# Altium PCB 三闪灯.PcbDoc
Units mm, origin at the board's own origin, x right, y up, seen from the top; angles counter-clockwise.
Board outline 152.4 x 101.6 mm, 2 copper layers (Top Layer, Bottom Layer); 16 components, 8 nets, 35 pads, 4 vias.
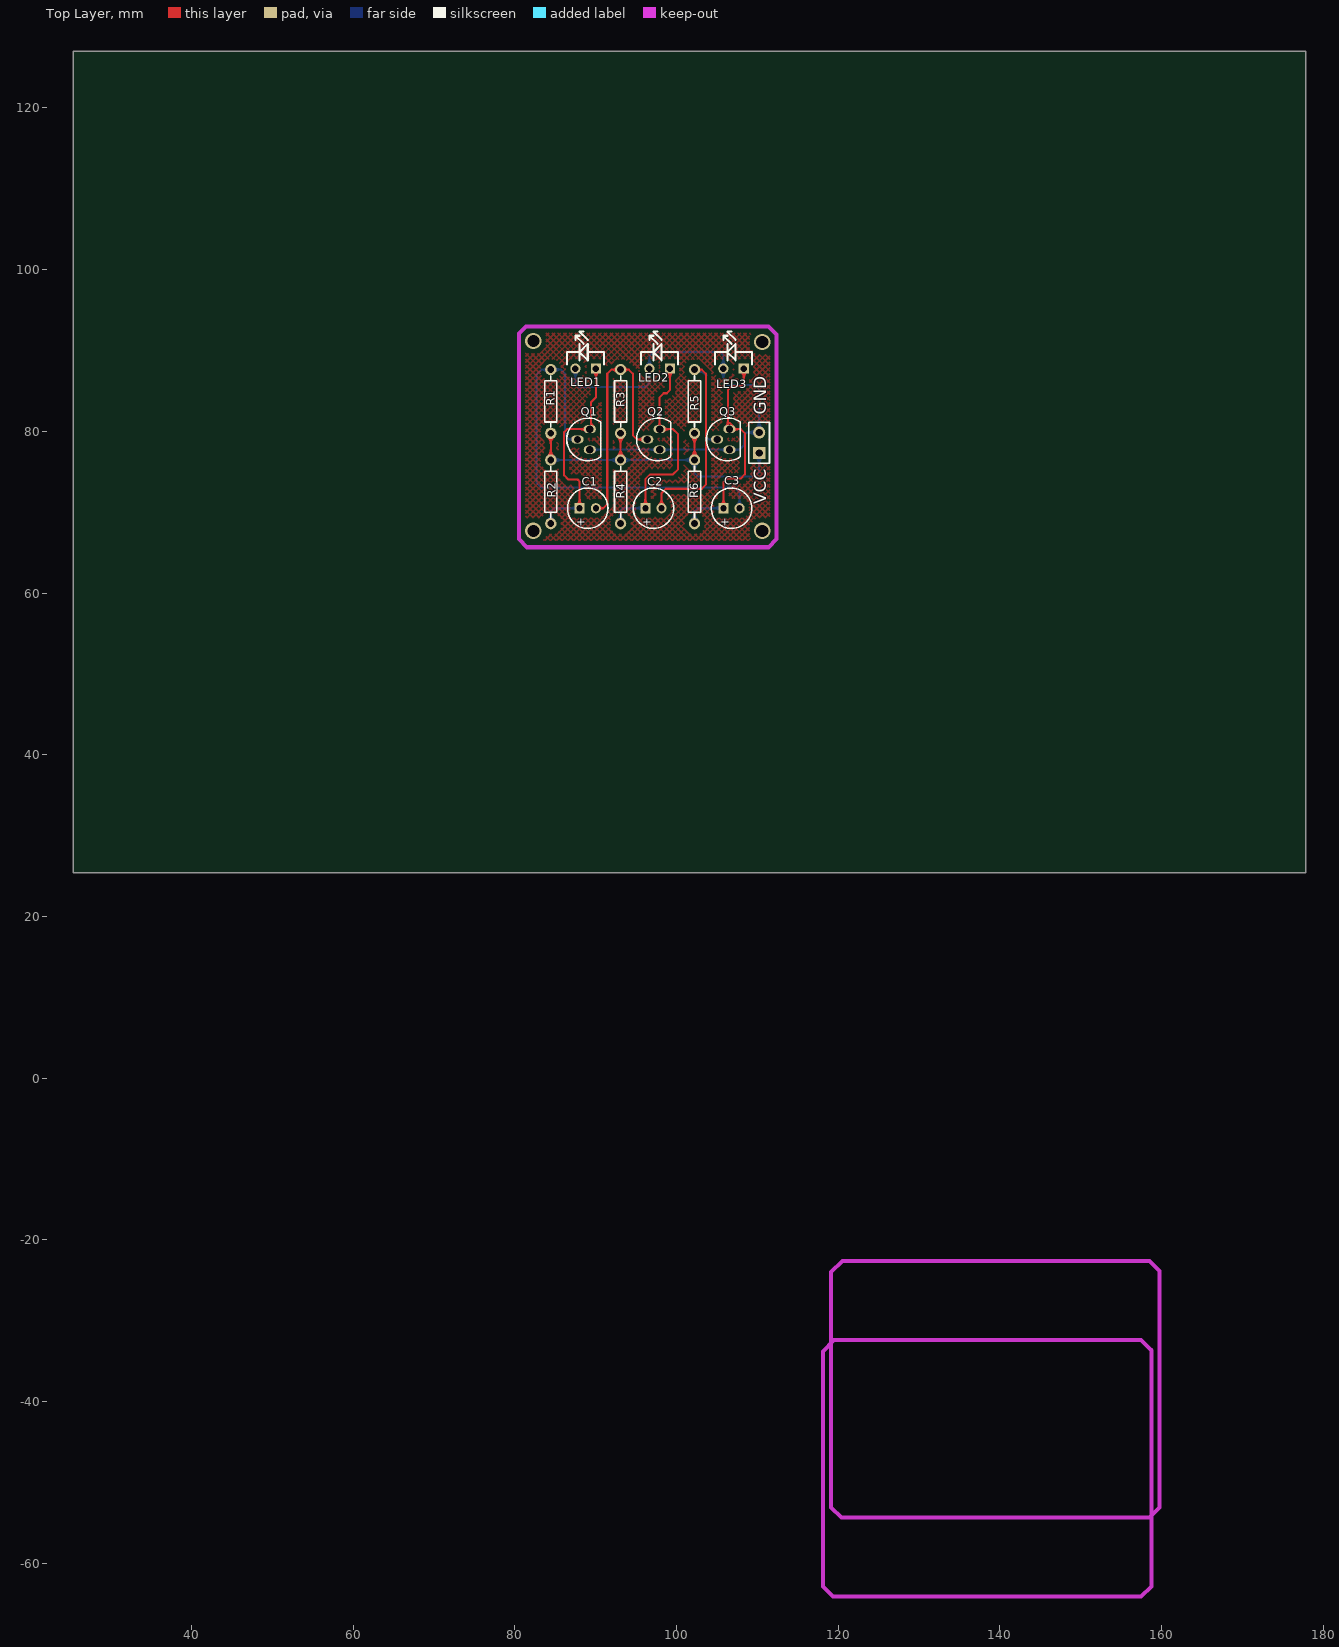
[diagram p0: Top Layer view]
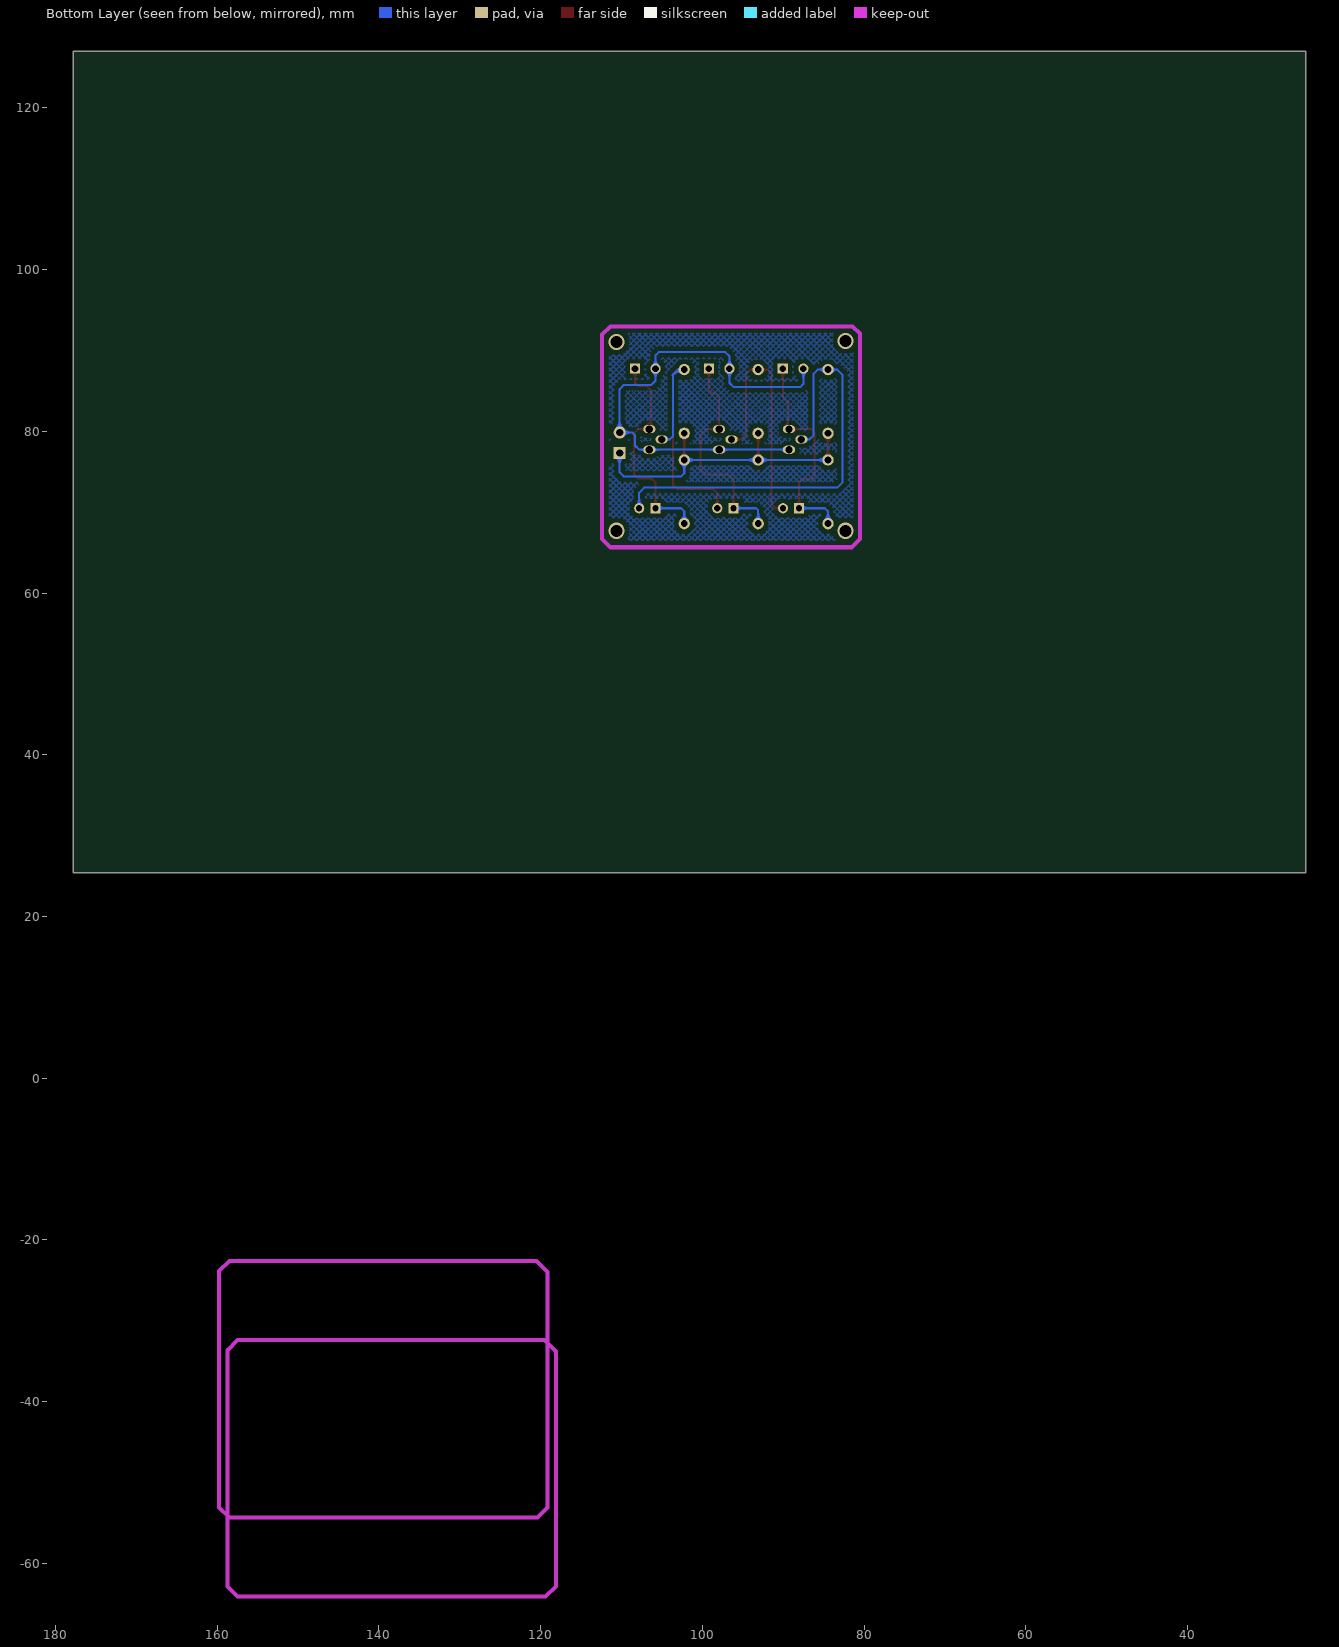
[diagram p1: Bottom Layer view, seen from below]

## Layer stack, top to bottom
Top Layer: signal copper 0.0356
Dielectric: dielectric 0.32, FR-4, Dk 4.8
Bottom Layer: signal copper 0.0356

## Board outline
25.4,25.4 177.8,25.4 177.8,127 25.4,127

## Design rules (kind name [scope] priority, off if disabled: settings)
Clearance [All] p1: gap=0.5
ComponentClearance [All] p1: gap=0.254 collisioncheckmode=3
PolygonConnect [All] p1: connectstyle=Relief reliefconductorwidth=0.254 reliefentries=4 polygonreliefangle="90 Angle"
RoutingTopology [All] p1: topology=Vertical
RoutingVias [All] p1: holewidth=0.711 width=1.27 viastyle="Through Hole" minholewidth=0.711 minwidth=1.27 maxholewidth=0.711 maxwidth=1.27
SolderMaskExpansion [All] p1: expansion=0.102
TestPointUsage [All] p1: valid=0 allowmultiple=FALSE
Testpoint [All] p1: side=15 testpointundercomponent=TRUE minsize=1.016 maxsize=2.54 preferedsize=1.524 minholesize=0 maxholesize=1.016 preferedholesize=0.813 testpointgrid=0.025 style=1023 order=-539222988
Width [All] p1: maxlimit=0.254 minlimit=0.254 preferedwidth=0.254
16 further rules are at their usual default settings.

## Classes and differential pairs
component class Sheet1: C1 C2 C3 LED1 LED2 LED3

## Components (designator, comment, footprint, x,y, rotation, side; value= is the part's Value field where it differs from the comment)
C1 "Cap" DJDR_5mm 89.027,70.485 r0 top
C2 "Cap" DJDR_5mm 97.155,70.485 r0 top
C3 "Cap" DJDR_5mm 106.807,70.485 r0 top
LED1 "LED2" LED 88.011,88.265 r0 top
LED2 "LED2" LED 97.155,88.265 r0 top
LED3 "LED2" LED 106.299,88.265 r0 top
P "Header 2H" HDR-2 111.379,81.153 r90 top
Q1 "2N3904" SANJG 90.551,76.581 r0 top
Q2 "2N3904" SANJG 99.187,76.581 r0 top
Q3 "2N3904" SANJG 107.823,76.581 r0 top
R1 "Res2" RSE 84.455,83.693 r270 top
R2 "Res2" RSE 84.455,72.517 r90 top
R3 "Res2" RSE 93.091,83.693 r270 top
R4 "Res2" RSE 93.091,72.517 r90 top
R5 "Res2" RSE 102.235,83.693 r270 top
R6 "Res2" RSE 102.235,72.517 r90 top

## Footprints (in the part's own frame and the unit in brackets; to place one, negate y for a bottom-side part, rotate by r counter-clockwise, add the part's x,y. Pads: shape width x height; smd on the part's side, far side on the other; paste and mask are expansions set on the pad)
DJDR_5mm [mm] "电解电容5mm"
  rect 1.25x1.25 hole 0.75: 1(-1,0)
  round 1.25 hole 0.75: 2(1,0)
  silkscreen extent -2.5,-2.5 2.5,2.5
HDR-2 [mm] "2排针"
  rect 1.5x1.5 hole 0.9: 1(-3.84,1.148)
  round 1.5 hole 0.9: 2(-1.3,1.148)
  silkscreen extent -5.11,-0.12 -0.03,2.42
LED [mil] "发光二极管"
  rect 50x50 hole 32: 1(80,-20)
  round 50 hole 32: 2(-20,-20)
  silkscreen extent -60,0 120,160
RSE [mm] "直插电阻1/8W"
  round 1.4 hole 0.85: 1(-3.937,0) 2(3.937,0)
  silkscreen extent -3.17,-0.76 3.17,0.76
SANJG [mm] "直插三极管"
  oval 1.5x1 hole 0.9: 1(-2.794,2.413) 2(-1.27,1.143) 3(-1.27,3.683)
  silkscreen extent -4.11,-0.23 0.08,5.07

## Part data
C1 C2 C3: "Capacitor"
LED1 LED2 LED3: "Typical RED, GREEN, YELLOW, AMBER GaAs LED"
P: "Header, 2-Pin, Right Angle"
Q1 Q2 Q3: "NPN General Purpose Amplifier"
R1 R2 R3 R4 R5 R6: "Resistor"

## Via types
v1: diameter 2, hole 1.5, Top Layer to Bottom Layer, 4 vias

## Nets (pads, with @x,y where several pads share a name; then routed paths per layer and width w, separated by ;. In a path a pad name is that pad's centre, name@x,y a point inside that pad or via, vN(x,y) a via of type N, cw(c..) or ccw(c..) an arc to the next point about the centre after c; other vN are vias at no path point)
GND: LED1.2 LED2.2 LED3.2 P.2 Q1.2 Q2.2 Q3.2 | length 84.6
  Bottom Layer w0.254: LED1.2@87.144,87.398 cw(c86.277,86.531) 87.503,86.531 cw(c88.729,86.531) LED1.2@87.862,87.398 ; LED1.2 87.503,85.852 87.884,85.471 96.139,85.471 96.647,85.979 LED2.2 96.647,89.281 97.155,89.789 105.41,89.789 105.791,89.408 LED3.2 105.791,86.233 106.299,85.725 109.723,85.725 110.231,85.217 P.2 108.682,79.853 108.331,79.502 108.331,78.24 107.823,77.732 106.553,77.732 97.917,77.732 92.706,77.732 92.699,77.724 ; Q1.2@89.083,77.732 Q1.2@89.281,77.732 ; Q1.2 92.699,77.724 ; Q1.2@89.795,77.46 cw(c90.431,76.824) 90.431,77.724 cw(c90.431,78.624) Q1.2@89.795,77.988 ; 92.706,77.724 92.699,77.724 ; LED2.2@96.288,87.398 cw(c95.421,86.531) 96.647,86.531 cw(c97.873,86.531) LED2.2@97.006,87.398 ; LED2.2@96.288,88.116 ccw(c95.421,88.983) 96.647,88.983 ccw(c97.873,88.983) LED2.2@97.006,88.116 ; 96.748,77.732 cw(c96.748,76.805) Q2.2@97.403,77.46 ; 96.785,77.732 ccw(c96.785,78.606) Q2.2@97.403,77.988 ; Q2.2@98.431,77.46 cw(c99.086,76.805) 99.086,77.732 ; Q2.2@98.431,77.988 ccw(c99.049,78.606) 99.049,77.732 ; 105.384,77.732 cw(c105.384,76.805) Q3.2@106.039,77.46 ; 105.421,77.732 ccw(c105.421,78.606) Q3.2@106.039,77.988 ; LED3.2@105.432,87.398 cw(c104.565,86.531) 105.791,86.531 cw(c107.017,86.531) LED3.2@106.15,87.398 ; LED3.2@105.432,88.116 ccw(c104.565,88.983) 105.791,88.983 ccw(c107.017,88.983) LED3.2@106.15,88.116 ; Q3.2@107.067,77.46 cw(c107.722,76.805) 107.722,77.732 ; Q3.2@107.067,77.988 ccw(c107.685,78.606) 107.685,77.732 ; P.2@109.79,79.412 ccw(c108.727,78.349) 108.727,79.853 ccw(c108.727,81.357) 109.79,80.294 ccw(c108.727,81.357) 110.231,81.357 ccw(c111.735,81.357) P.2@110.672,80.294 ; P.2@109.97,79.592 ccw(c109.34,78.962) 109.34,79.853 ccw(c109.34,80.744) 109.97,80.114 ccw(c109.34,80.744) 110.231,80.744 ccw(c111.122,80.744) P.2@110.492,80.114
NetC1_1: C1.1 LED1.1 Q1.3 R2.1 | length 39.7
  Top Layer w0.254: C1.1@87.675,70.837 ccw(c86.825,71.687) 88.027,71.687 ccw(c89.229,71.687) C1.1@88.379,70.837 ; C1.1 88.027,73.771 87.757,74.041 86.614,74.041 86.106,74.549 86.106,79.883 86.487,80.264 Q1.3 89.408,80.391 89.408,83.566 90.043,84.201 LED1.1 ; Q1.3@88.767,80 ccw(c88.131,79.364) 88.131,80.264 ccw(c88.131,81.164) Q1.3@88.767,80.528 ; Q1.3@89.267,80.528 ccw(c88.927,80.868) 89.408,80.868 ; 89.408,80.848 ccw(c90.115,80.848) Q1.3@89.615,80.348 ; 89.408,81.461 ccw(c90.728,81.461) Q1.3@89.795,80.528 ; LED1.1@89.684,87.398 cw(c88.817,86.531) 90.043,86.531 cw(c91.269,86.531) LED1.1@90.402,87.398
  Bottom Layer w0.254: R2.1@84.05,68.985 ccw(c83.072,69.963) 84.455,69.963 ccw(c85.838,69.963) R2.1@84.86,68.985 ; R2.1@84.229,68.806 ccw(c83.685,69.35) 84.455,69.35 ccw(c85.225,69.35) R2.1@84.681,68.806 ; R2.1 84.455,70.104 84.836,70.485 C1.1 ; C1.1@87.675,70.133 ccw(c86.825,69.283) 86.825,70.485 ccw(c86.825,71.687) C1.1@87.675,70.837
NetC1_2: C1.2 Q2.1 R3.1 | length 37.6
  Top Layer w0.254: C1.2 90.932,70.485 ; C1.2@90.448,70.219 cw(c90.932,69.912) 90.932,70.485 ; C1.2@90.448,70.751 ccw(c90.932,71.058) 90.932,70.485 ; R3.1@92.632,87.287 ccw(c91.948,86.777) 91.948,87.63 ; R3.1@92.632,87.973 cw(c91.948,88.483) 91.948,87.63 ; R3.1@93.581,87.334 cw(c94.107,87.016) 94.107,87.63 ; R3.1@93.581,87.926 ccw(c94.107,88.244) 94.107,87.63 ; Q2.1@95.879,79.258 cw(c95.243,79.894) 95.243,78.994 cw(c95.243,78.094) 95.879,78.73 95.879,78.871 Q2.1@96.002,78.994 ; Q2.1 Q2.1@96.002,78.994 ; Q2.1@96.917,79.002 96.909,78.994 96.858,79.045 96.393,79.045 96.053,79.045 Q2.1@96.002,78.994 ; 90.932,70.485 91.44,70.993 91.44,87.122 91.948,87.63 ; 91.948,87.63 R3.1 94.107,87.63 ; 94.107,87.63 94.615,87.122 94.615,79.502 95.123,78.994 Q2.1@96.002,78.994
NetC2_1: C2.1 LED2.1 Q2.3 R4.1 | length 40
  Top Layer w0.254: C2.1@95.803,70.837 ccw(c94.953,71.687) 96.155,71.687 ccw(c97.357,71.687) C2.1@96.507,70.837 ; C2.1 96.155,74.057 96.774,74.676 99.568,74.676 100.203,75.311 100.203,79.629 99.568,80.264 Q2.3 97.917,84.201 98.425,84.709 98.806,84.709 99.187,85.09 LED2.1 ; Q2.3@97.653,80.528 ccw(c97.017,81.164) 97.917,81.164 ccw(c98.817,81.164) Q2.3@98.181,80.528 ; Q2.3@98.431,80 cw(c99.067,79.364) 99.067,80.264 cw(c99.067,81.164) Q2.3@98.431,80.528 ; LED2.1@98.828,87.398 cw(c97.961,86.531) 99.187,86.531 cw(c100.413,86.531) LED2.1@99.546,87.398
  Bottom Layer w0.254: R4.1@92.686,68.985 ccw(c91.708,69.963) 93.091,69.963 ccw(c94.474,69.963) R4.1@93.496,68.985 ; R4.1@92.865,68.806 ccw(c92.321,69.35) 93.091,69.35 ccw(c93.861,69.35) R4.1@93.317,68.806 ; R4.1 93.091,70.231 93.345,70.485 C2.1 ; C2.1@95.803,70.133 ccw(c94.953,69.283) 94.953,70.485 ccw(c94.953,71.687) C2.1@95.803,70.837
NetC2_2: C2.2 Q3.1 R5.1 | length 42.1
  Top Layer w0.254: C2.2@97.803,70.837 ccw(c96.953,71.687) 98.155,71.687 ccw(c99.357,71.687) C2.2@98.507,70.837 ; C2.2 98.155,72.374 98.679,72.898 103.124,72.898 103.632,73.406 103.632,87.122 103.124,87.63 ; R5.1 103.124,87.63 ; R5.1@102.757,87.393 cw(c103.124,87.227) 103.124,87.63 ; R5.1@102.757,87.867 ccw(c103.124,88.033) 103.124,87.63
  Bottom Layer w0.254: R5.1@102.19,87.814 cw(c102.408,86.924) 103.056,87.571 ; R5.1 102.997,87.63 ; R5.1@102.25,87.567 cw(c102.533,86.411) 103.375,87.252 ; R5.1@102.311,87.32 cw(c102.659,85.898) 103.694,86.933 ; R5.1@102.785,87.471 cw(c102.997,87.41) 102.997,87.63 ; R5.1@102.785,87.789 ccw(c102.997,87.85) 102.997,87.63 ; Q3.1@104.485,78.764 ccw(c104.013,78.394) 104.013,78.994 ; Q3.1@104.485,79.224 cw(c104.013,79.594) 104.013,78.994 ; Q3.1 104.013,78.994 ; 102.997,87.63 103.632,86.995 103.632,79.375 104.013,78.994
NetC3_1: C3.1 LED3.1 Q3.3 R6.1 | length 40.5
  Top Layer w0.254: C3.1@105.455,70.837 ccw(c104.605,71.687) 105.807,71.687 ccw(c107.009,71.687) C3.1@106.159,70.837 ; C3.1 105.807,73.676 106.299,74.168 107.95,74.168 108.458,74.676 108.458,79.756 107.95,80.264 Q3.3 ; Q3.3@106.039,80.528 ccw(c105.276,81.291) 106.355,81.291 ; Q3.3@106.355,80.272 106.355,81.038 ; Q3.3@106.567,80.528 cw(c107.077,81.038) 106.355,81.038 ; Q3.3@107.067,80 cw(c107.703,79.364) 107.703,80.264 cw(c107.703,81.164) 107.067,80.528 106.942,80.653 106.568,81.026 106.368,81.026 106.355,81.038 ; LED3.1@107.972,87.398 cw(c107.105,86.531) 108.331,86.531 cw(c109.557,86.531) LED3.1@108.69,87.398 ; LED3.1 108.331,85.979 107.95,85.598 106.858,85.598 106.355,85.095 106.355,81.038
  Bottom Layer w0.254: R6.1@101.83,68.985 ccw(c100.852,69.963) 102.235,69.963 ccw(c103.618,69.963) R6.1@102.64,68.985 ; R6.1@102.009,68.806 ccw(c101.465,69.35) 102.235,69.35 ccw(c103.005,69.35) R6.1@102.461,68.806 ; R6.1 102.235,70.104 102.616,70.485 C3.1 ; C3.1@105.455,70.133 ccw(c104.605,69.283) 104.605,70.485 ccw(c104.605,71.687) C3.1@105.455,70.837
NetC3_2: C3.2 Q1.1 R1.1 | length 61.8
  Bottom Layer w0.254: R1.1@83.996,87.287 ccw(c83.312,86.777) 83.312,87.63 ; R1.1@83.996,87.973 cw(c83.312,88.483) 83.312,87.63 ; R1.1@84.694,87.419 cw(c85.162,87.006) 85.162,87.63 cw(c85.162,88.254) R1.1@84.694,87.841 ; R1.1@84.885,87.251 cw(c85.725,86.509) 85.725,87.63 ; R1.1@84.885,88.009 ccw(c85.725,88.751) 85.725,87.63 ; Q1.1@87.213,78.764 ccw(c86.741,78.394) 86.741,78.994 ; Q1.1@87.213,79.224 cw(c86.741,79.594) 86.741,78.994 ; Q1.1 86.741,78.994 ; C3.2@107.455,70.837 ccw(c106.605,71.687) 107.807,71.687 ccw(c109.009,71.687) C3.2@108.159,70.837 ; C3.2 107.807,72.406 107.188,73.025 83.312,73.025 82.677,73.66 82.677,86.995 83.312,87.63 ; 83.312,87.63 R1.1 85.725,87.63 ; 85.725,87.63 86.233,87.122 86.233,79.502 86.741,78.994
VCC: P.1 R1.2 R2.2 R3.2 R4.2 R5.2 R6.2 | length 81.1
  Top Layer w0.254: R2.2@84.05,76.859 ccw(c83.072,77.837) 84.455,77.837 ccw(c85.838,77.837) R2.2@84.86,76.859 ; R1.2@84.05,79.351 cw(c83.072,78.373) 84.455,78.373 cw(c85.838,78.373) R1.2@84.86,79.351 ; R2.2@84.229,76.68 ccw(c83.685,77.224) 84.455,77.224 ccw(c85.225,77.224) R2.2@84.681,76.68 ; R1.2@84.229,79.53 cw(c83.685,78.986) 84.455,78.986 cw(c85.225,78.986) R1.2@84.681,79.53 ; R2.2 R1.2 ; R4.2@92.686,76.859 ccw(c91.708,77.837) 93.091,77.837 ccw(c94.474,77.837) R4.2@93.496,76.859 ; R3.2@92.686,79.351 cw(c91.708,78.373) 93.091,78.373 cw(c94.474,78.373) R3.2@93.496,79.351 ; R4.2@92.865,76.68 ccw(c92.321,77.224) 93.091,77.224 ccw(c93.861,77.224) R4.2@93.317,76.68 ; R3.2@92.865,79.53 cw(c92.321,78.986) 93.091,78.986 cw(c93.861,78.986) R3.2@93.317,79.53 ; R4.2 R3.2 ; R6.2@101.83,76.859 ccw(c100.852,77.837) 102.235,77.837 ccw(c103.618,77.837) R6.2@102.64,76.859 ; R5.2@101.83,79.351 cw(c100.852,78.373) 102.235,78.373 cw(c103.618,78.373) R5.2@102.64,79.351 ; R6.2@102.009,76.68 ccw(c101.465,77.224) 102.235,77.224 ccw(c103.005,77.224) R6.2@102.461,76.68 ; R5.2@102.009,79.53 cw(c101.465,78.986) 102.235,78.986 cw(c103.005,78.986) R5.2@102.461,79.53 ; R6.2 R5.2
  Bottom Layer w0.254: R2.2 R4.2 R6.2 102.235,74.803 102.616,74.422 109.728,74.422 110.231,74.925 P.1 ; R2.2@84.681,76.228 cw(c85.225,75.684) 85.225,76.454 cw(c85.225,77.224) R2.2@84.681,76.68 ; R2.2@84.86,76.049 cw(c85.838,75.071) 85.838,76.454 cw(c85.838,77.837) R2.2@84.86,76.859 ; R4.2@92.686,76.049 ccw(c91.708,75.071) 91.708,76.454 ccw(c91.708,77.837) R4.2@92.686,76.859 ; R4.2@92.865,76.228 ccw(c92.321,75.684) 92.321,76.454 ccw(c92.321,77.224) R4.2@92.865,76.68 ; R4.2@93.317,76.228 cw(c93.861,75.684) 93.861,76.454 cw(c93.861,77.224) R4.2@93.317,76.68 ; R4.2@93.496,76.049 cw(c94.474,75.071) 94.474,76.454 cw(c94.474,77.837) R4.2@93.496,76.859 ; R6.2@101.83,76.859 cw(c100.852,77.837) 100.852,76.454 cw(c100.852,75.071) 101.83,76.049 cw(c100.852,75.071) 102.235,75.071 cw(c103.618,75.071) R6.2@102.64,76.049 ; R6.2@102.009,76.68 cw(c101.465,77.224) 101.465,76.454 cw(c101.465,75.684) 102.009,76.228 cw(c101.465,75.684) 102.235,75.684 cw(c103.005,75.684) R6.2@102.461,76.228 ; P.1@109.79,76.872 cw(c108.727,75.809) 110.231,75.809 cw(c111.735,75.809) P.1@110.672,76.872 ; P.1@109.97,77.052 cw(c109.34,76.422) 110.231,76.422 cw(c111.122,76.422) P.1@110.492,77.052
copper on no net:
  other v1: 82.296,67.691 110.617,67.691 110.617,91.059 82.296,91.186

## Polygon pours and split planes (outlines as drawn)
no net on Top Layer (hatched 45Degree grid 0.508 track 0.203): 95.064,92.329 82.11,92.329 81.348,91.567 81.348,66.548 81.983,65.913 111.447,65.913 112.336,66.802 112.336,91.44 111.447,92.329
no net on Bottom Layer (hatched 45Degree grid 0.508 track 0.203): 97.368,92.837 81.016,92.837 81.016,67.31 81.932,66.421 111.496,66.421 111.496,92.837 96.845,92.837 96.845,92.964

## Keep-outs
Keep-Out Layer:
  lines w0.5: 80.518,76.835 80.518,92.075 81.407,92.964 111.379,92.964 112.395,91.948 112.395,66.675 111.379,65.659 81.534,65.659 80.518,66.675 80.518,90.043 ; 118.11,-46.355 118.11,-33.782 119.507,-32.385 157.48,-32.385 158.75,-33.655 158.75,-62.865 157.48,-64.135 119.38,-64.135 118.11,-62.865 118.11,-38.989 ; 119.126,-36.576 119.126,-24.003 120.523,-22.606 158.496,-22.606 159.766,-23.876 159.766,-53.086 158.496,-54.356 120.396,-54.356 119.126,-53.086 119.126,-29.21

## Silkscreen, mask and mechanical layers (free items; w line width, h text height)
Top Overlay:
  text "GND" at 111.125,82.042 h1.52 r90
  text "VCC" at 111.125,70.993 h1.52 r90
Mechanical 1:
  lines w0.5: 80.518,83.947 80.518,92.075 81.407,92.964 81.661,92.964 111.379,92.964 112.395,91.948 112.395,66.675 111.506,65.786 81.28,65.786 80.518,66.548 80.518,88.265 ; 118.11,-41.402 118.11,-33.655 119.38,-32.385 157.48,-32.385 158.75,-33.655 158.75,-62.865 157.48,-64.135 119.38,-64.135 118.11,-62.865 118.11,-38.608 ; 119.126,-31.623 119.126,-23.876 120.396,-22.606 158.496,-22.606 159.766,-23.876 159.766,-53.086 158.496,-54.356 120.396,-54.356 119.126,-53.086 119.126,-28.829

## Text inside footprints (layer, text, board x,y; h text height)
C1: Top Overlay "+" at 87.63,68.326 h1.02
C2: Top Overlay "+" at 95.758,68.326 h1.02
C3: Top Overlay "+" at 105.41,68.326 h1.02